# EAGLE board hwk2 (EAGLE 8.1.0)
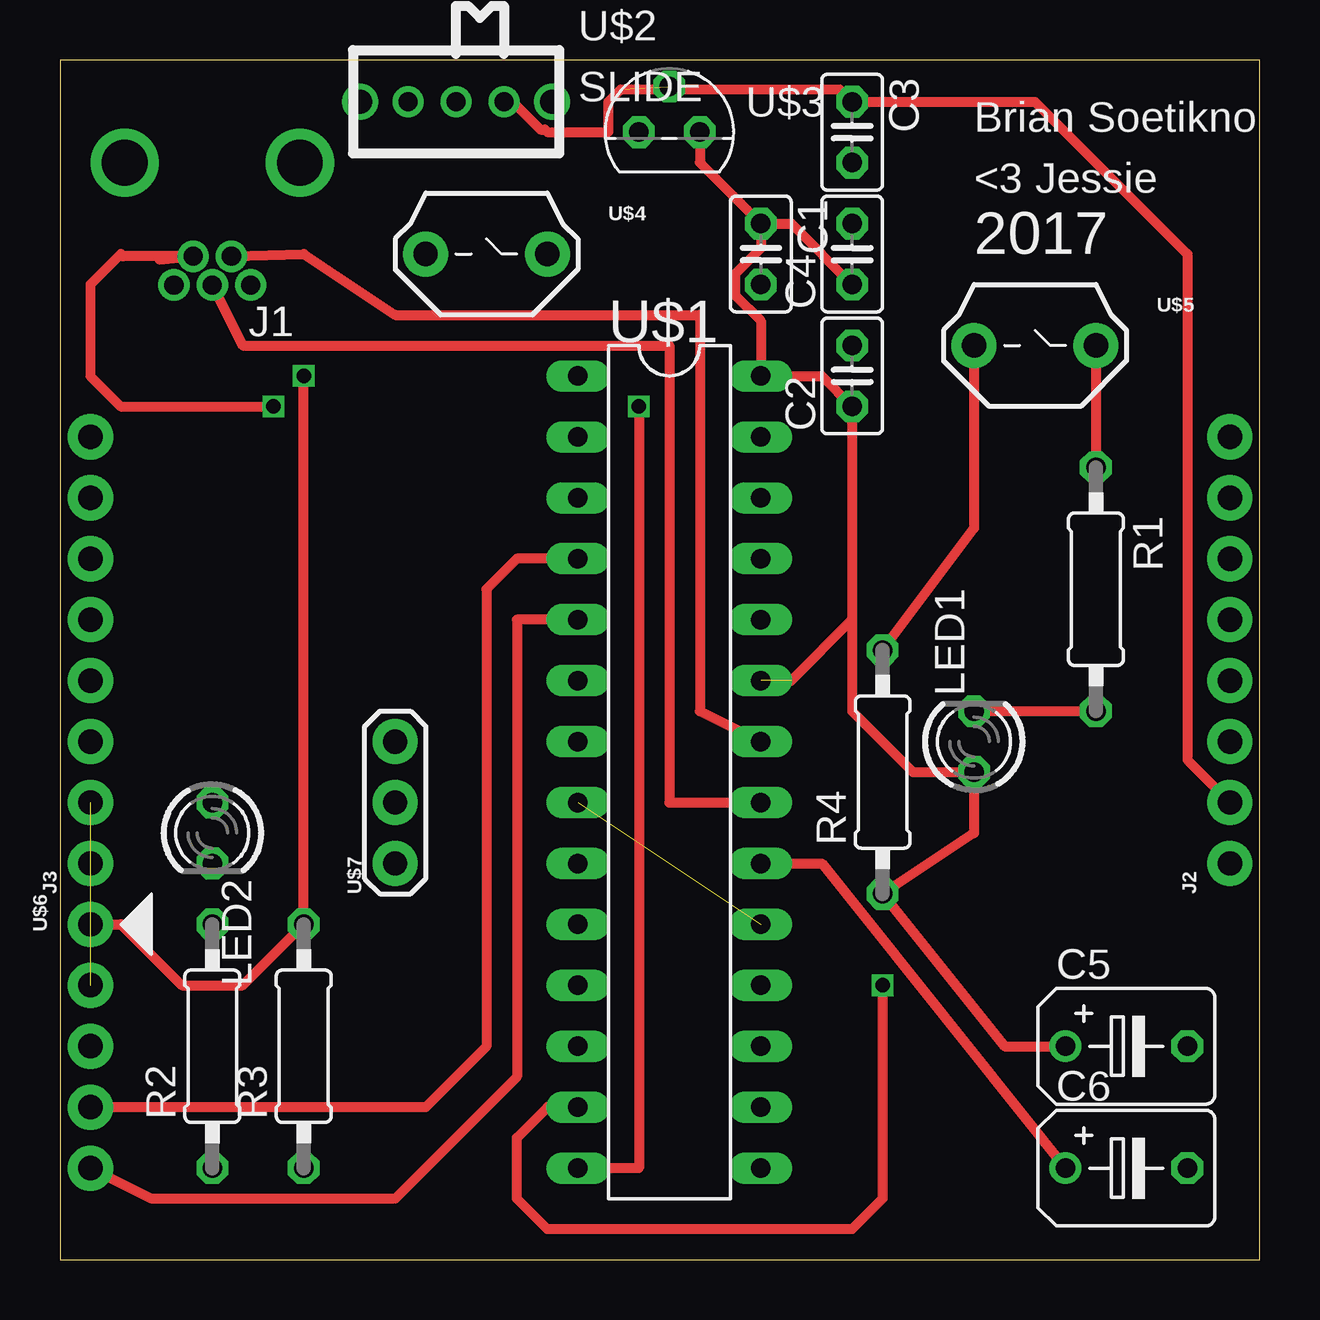
[diagram p0: board, top side]
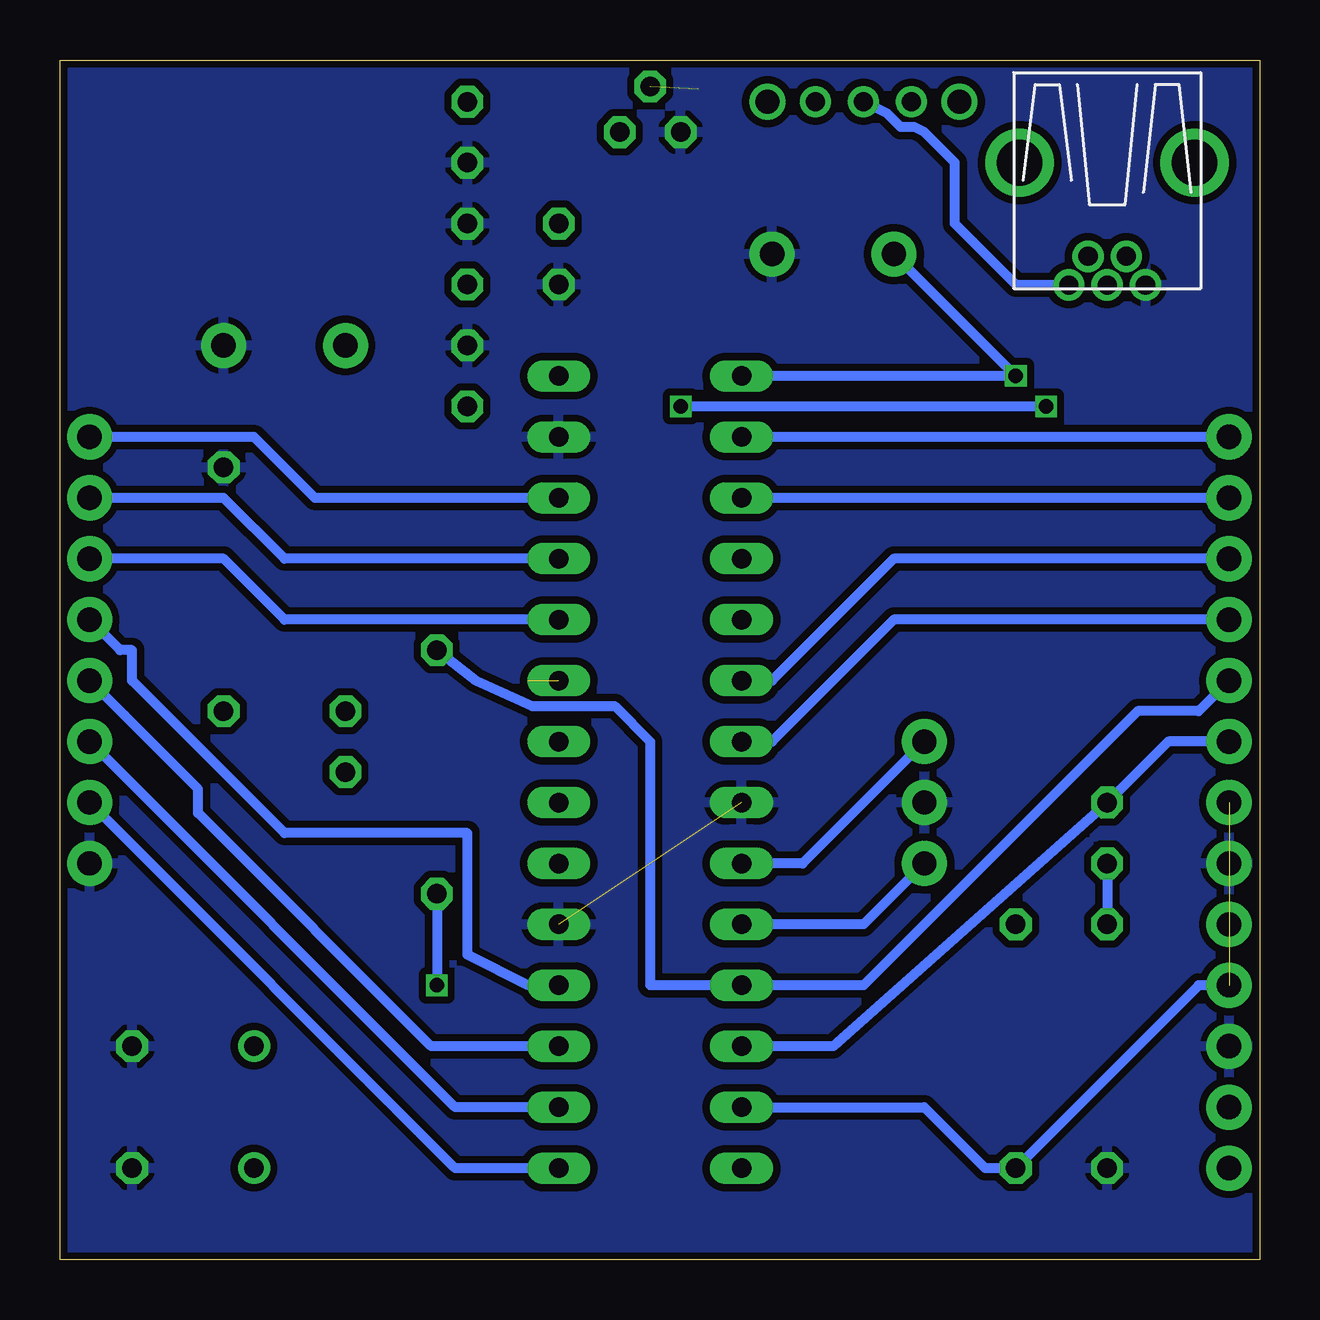
[diagram p1: board, bottom side, seen from below]

Size 50 x 50 mm. Coordinates in mm from the lower left corner, seen from the top.
Outline: 0,0 50,0 50,50 0,50 0,0
Copper layers (1*16): Top 0.035mm / dielectric 1.5mm / Bottom 0.035mm
Design rules "SeeedStudio_2layer_DRU_no_angle_20140221": minimum track width 6mil, minimum drill 12mil, track to track 6mil, track to pad 6mil, pad to pad 6mil, via to via 6mil, smd to smd 0mil, copper to edge 10mil, drill to drill 10mil, minimum pad ring 10mil, minimum via ring 6mil, stop-mask expansion 2mil, vias tented up to drill 100mil, thermal gap 10mil

## Footprints (pad centres in the part's own frame; a part is rotated, then mirrored left to right if it is on the bottom)
C025-025X050 = drill 0.813 octagon: 1 -1.27,0; 2 1.27,0
B45181B = drill 0.813: + -2.54,0 | drill 0.813 octagon: - 2.54,0
USB-MB-H = drill 0.8: D+ 5.1,0; D- 3.9,0.8; GND 5.1,-1.6; ID 3.9,-0.8; VBUS 5.1,1.6 | drill 1.9: P$6 0,-3.65; P$7 0,3.65
1X08 = drill 1.016 pad 1.88: 1 0,0; 2 2.54,0; 3 5.08,0; 4 7.62,0; 5 10.16,0; 6 12.7,0; 7 15.24,0; 8 17.78,0
LED3MM = drill 0.813 octagon: A -1.27,0; K 1.27,0
0207/10 = drill 0.813 octagon: 1 -5.08,0; 2 5.08,0
DIL28-3 = drill 0.813 long: 1 -16.51,-3.81; 2 -13.97,-3.81; 3 -11.43,-3.81; 4 -8.89,-3.81; 5 -6.35,-3.81; 6 -3.81,-3.81; 7 -1.27,-3.81; 8 1.27,-3.81; 9 3.81,-3.81; 10 6.35,-3.81; 11 8.89,-3.81; 12 11.43,-3.81; 13 13.97,-3.81; 14 16.51,-3.81; 15 16.51,3.81; 16 13.97,3.81; 17 11.43,3.81; 18 8.89,3.81; 19 6.35,3.81; 20 3.81,3.81; 21 1.27,3.81; 22 -1.27,3.81; 23 -3.81,3.81; 24 -6.35,3.81; 25 -8.89,3.81; 26 -11.43,3.81; 27 -13.97,3.81; 28 -16.51,3.81
SLIDE = drill 0.8: 1 -2,0; 2 0,0; 3 2,0 | drill 1: P$1 -4,0; P$2 4,0
TO92 = drill 0.813 octagon: 1 -1.27,0; 2 0,1.905; 3 1.27,0
PB = drill 1.016 pad 1.88: 1 -2.54,0; 2 2.54,0
1X05 = drill 1.016 pad 1.88: 1 0,0; 2 2.54,0; 3 5.08,0; 4 7.62,0; 5 10.16,0
OSC = drill 1.016 pad 1.88: 1 -2.54,0; 2 0,0; 3 2.54,0

## Placement (x,y rotation side)
C1  0.1uF  [C025-025X050]  29.21,41.91 270 top
C2  0.1uF  [C025-025X050]  33.02,36.83 90 top
C3  0.1uF  [C025-025X050]  33.02,46.99 270 top
C4  0.1uF  [C025-025X050]  33.02,41.91 90 top
C5  10uF  [B45181B]  44.45,8.89 0 top
C6  10uF  [B45181B]  44.45,3.81 0 top
J1  USB-MB-H  [USB-MB-H]  6.35,45.72 270 top
J2  [1X08]  48.77,16.51 90 top
J3  [1X08]  1.27,16.51 90 top
LED1  Red  [LED3MM]  38.1,21.59 90 top
LED2  Green  [LED3MM]  6.35,17.78 270 top
R1  330  [0207/10]  43.18,27.94 270 top
R2  330  [0207/10]  6.35,8.89 90 top
R3  10k  [0207/10]  10.16,8.89 90 top
R4  10k  [0207/10]  34.29,20.32 90 top
U$1  PIC32MX250F128B  [DIL28-3]  25.4,20.32 270 top
U$2  SLIDE  [SLIDE]  16.51,48.26 0 top
U$3  MCP1702  [TO92]  25.4,46.99 0 top
U$4  RESET  [PB]  17.78,41.91 0 top
U$5  USER  [PB]  40.64,38.1 0 top
U$6  PICKIT3  [1X05]  1.27,13.97 270 top
U$7  8MHz  [OSC]  13.97,19.05 90 top

## Library data of the parts
C1-C6 J1-J3 R1-R4 U$1-U$7 = me_433_hwk2
LED1 LED2 = led

## Nets
+3V3: C1.1 C2.1 C4.1 C5.+ J3.2 LED1.A R3.1 R4.1 U$1.13 U$1.23 U$1.28 U$3.3 U$6.2
+5V: C3.1 J2.2 U$1.15 U$2.3 U$3.2
A0: J3.8 U$1.2
A1: J3.7 U$1.3
A4/LED: J3.3 LED2.A U$1.12
B2: J3.6 U$1.6
B3: J3.5 U$1.7
B4/USER: J3.4 R4.2 U$1.11 U$5.1
B7: J2.3 U$1.16
B8: J2.4 U$1.17
B9: J2.5 U$1.18
B13: J2.6 U$1.24
B14: J2.7 U$1.25
B15: J2.8 U$1.26
D+: J1.D+ U$1.21
D-: J1.D- U$1.22
GND: C1.2 C2.2 C3.2 C4.2 C5.- C6.- J1.GND J2.1 J3.1 R1.1 R2.1 U$1.8 U$1.19 U$1.27 U$3.1 U$4.2 U$5.2 U$6.3 U$7.2
MCLR: R3.2 U$1.1 U$4.1 U$6.1
N$1: J1.VBUS U$2.2
N$2: LED1.K R1.2
N$3: U$1.9 U$7.3
N$4: U$1.10 U$7.1
N$5: C6.+ U$1.20
N$6: LED2.K R2.2
PGC: U$1.5 U$6.5
PGD: U$1.4 U$6.4
USBID: J1.ID U$1.14

## Tracks (layer width: path | path; a pad name or v marks a point on that pad's centre or on a via)
+3V3  (via drill 0.6)  (2 unrouted)
  Top 0.406: C5.+ 39.37,8.89 R4.1 38.1,17.78 LED1.A 35.56,20.32 33.02,22.86 33.02,26.67 | 33.02,26.67 C2.1 31.75,36.83 U$1.28 29.21,39.13 28.14,40.2 28.14,41.08 29.21,42.15 C1.1 | 33.02,26.67 30.48,24.13 | U$3.3 26.67,45.72 C1.1 | C1.1 30.48,43.18 C4.1 | v34.29,11.43 34.29,2.54 33.02,1.27 20.32,1.27 19.05,2.54 19.05,5.08 20.32,6.35 U$1.13
  Bottom 0.406: U$6.2 2.54,11.43 R3.1 11.43,3.81 13.97,6.35 U$1.13 | R4.1 v34.29,11.43
+5V  (1 unrouted)
  Top 0.406: J2.2 46.99,20.83 46.99,41.91 40.64,48.26 C3.1 32.5,48.78 23.38,48.78 22.86,48.26 22.86,46.99 20.32,46.99 20.21,47.1 20.03,47.1 18.87,48.26 U$2.3
  Bottom 0.406: U$1.15 33.53,3.81 J2.2
A0
  Bottom 0.406: J3.8 U$1.2
A1
  Bottom 0.406: J3.7 U$1.3
A4/LED
  Bottom 0.406: J3.3 3.81,21.59 LED2.A 17.78,8.89 U$1.12
B2
  Bottom 0.406: J3.6 15.24,29.21 20.32,24.13 U$1.6
B3
  Bottom 0.406: J3.5 15.24,26.67 20.32,21.59 U$1.7
B4/USER
  Top 0.406: U$5.1 38.1,30.48 R4.2
  Bottom 0.406: R4.2 32.65,24.13 30.31,23.06 26.87,23.06 25.4,21.59 25.4,11.43 U$1.11 16.51,11.43 5.08,22.86 2.54,22.86 J3.4
B7
  Bottom 0.406: U$1.16 33.53,6.35 J2.3
B8
  Bottom 0.406: J2.4 44.25,19.61 44.25,18.61 34.53,8.89 U$1.17
B9
  Bottom 0.406: U$1.18 30.48,11.43 33.02,12.7 33.02,17.78 40.64,17.78 46.99,24.13 46.99,25.4 47.5,25.4 J2.5
B13
  Bottom 0.406: U$1.24 40.64,26.67 43.18,29.21 J2.6
B14
  Bottom 0.406: U$1.25 40.64,29.21 43.18,31.75 J2.7
B15
  Bottom 0.406: U$1.26 39.37,31.75 41.91,34.29 J2.8 | J2.8
D+
  Top 0.406: U$1.21 25.4,19.05 25.4,38.1 7.62,38.1 J1.D+
D-
  Top 0.406: J1.D- 10.16,41.91 13.97,39.37 26.67,39.37 26.67,22.86 U$1.22
GND  (1 unrouted)
  Top 0.406: U$5.2 R1.1
  pour Bottom (isolate 0.305): 0,49.53 0,0 49.53,0 49.53,49.53
MCLR  (via drill 0.6)
  Top 0.406: v10.16,36.83 R3.2 7.62,11.43 5.08,11.43 2.54,13.97 U$6.1
  Bottom 0.406: U$1.1 v10.16,36.83 U$4.1
N$1
  Bottom 0.406: J1.VBUS 10.16,40.64 12.7,43.18 12.7,45.72 13.97,46.99 14.39,47.2 14.95,47.2 15.51,47.76 U$2.2
N$2
  Top 0.406: LED1.K R1.2
N$3
  Bottom 0.406: U$1.9 19.05,16.51 U$7.3
N$4
  Bottom 0.406: U$7.1 16.51,13.97 U$1.10
N$5
  Top 0.406: U$1.20 31.75,16.51 C6.+
N$6
  Bottom 0.406: LED2.K R2.2
PGC
  Top 0.406: U$1.5 19.05,26.67 19.05,7.62 13.97,2.54 3.81,2.54 U$6.5
PGD
  Top 0.406: U$1.4 19.05,29.21 17.78,27.94 17.78,8.89 15.24,6.35 U$6.4
USBID  (via drill 0.6)
  Top 0.406: 4.14,41.68 J1.ID 2.63,41.82 2.54,41.91 1.27,40.64 1.27,36.83 2.54,35.56 v8.89,35.56 | v24.13,35.56 24.13,3.81 U$1.14
  Bottom 0.406: v8.89,35.56 v24.13,35.56

## Text on the board
tPlace: Brian Soetikno | <3 Jessie | 2017